# Altium PCB Main Board Layout.PcbDoc
Units mil, origin at the board's own origin, x right, y up, seen from the top; angles counter-clockwise.
Board outline 6700 x 5305 mil, 4 copper layers (Top Layer, VCC5V0 Plane, Ground Plane, Bottom Layer), stack 23.756 mil thick; 86 components, 68 nets, 341 pads, 27 vias.
Unrouted connection lines stored in the file: 4.
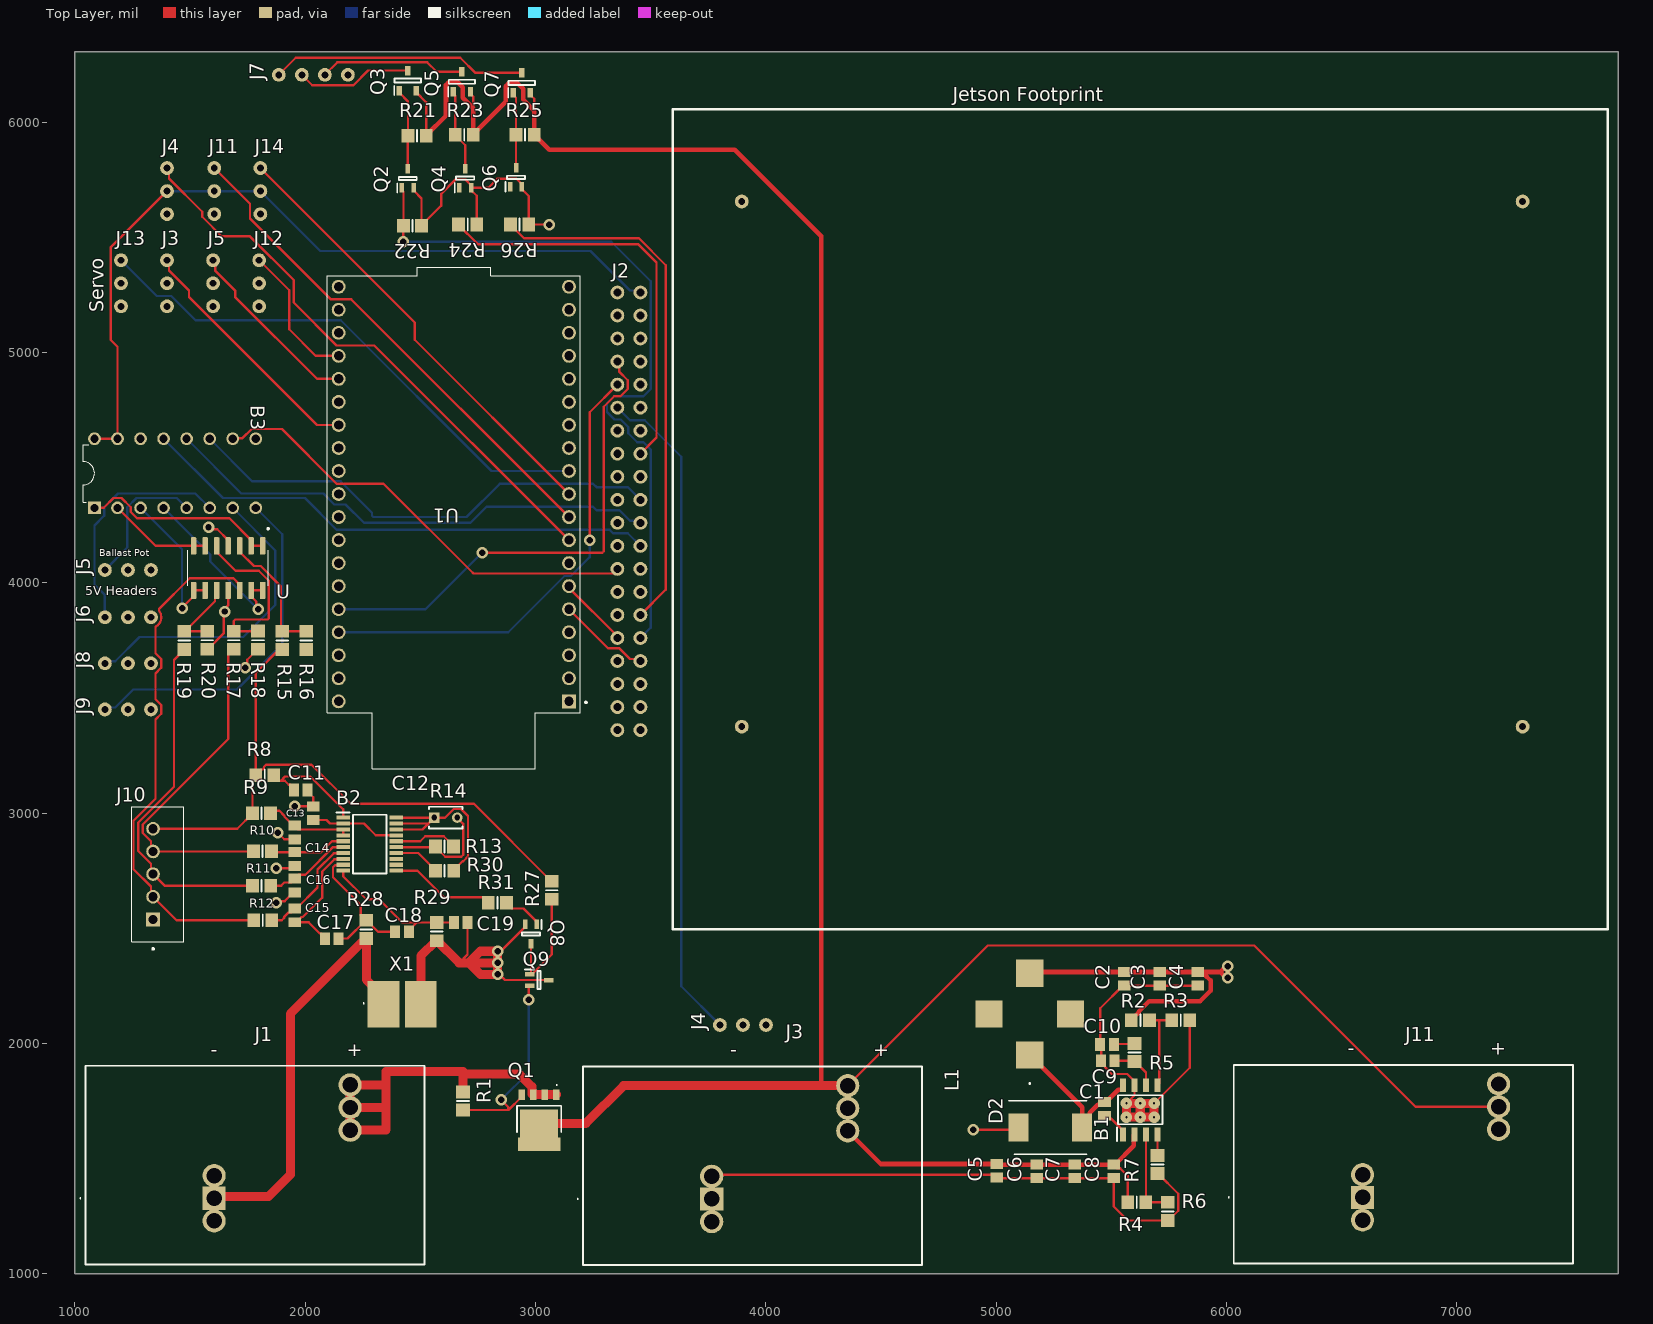
[diagram p0: Top Layer view]
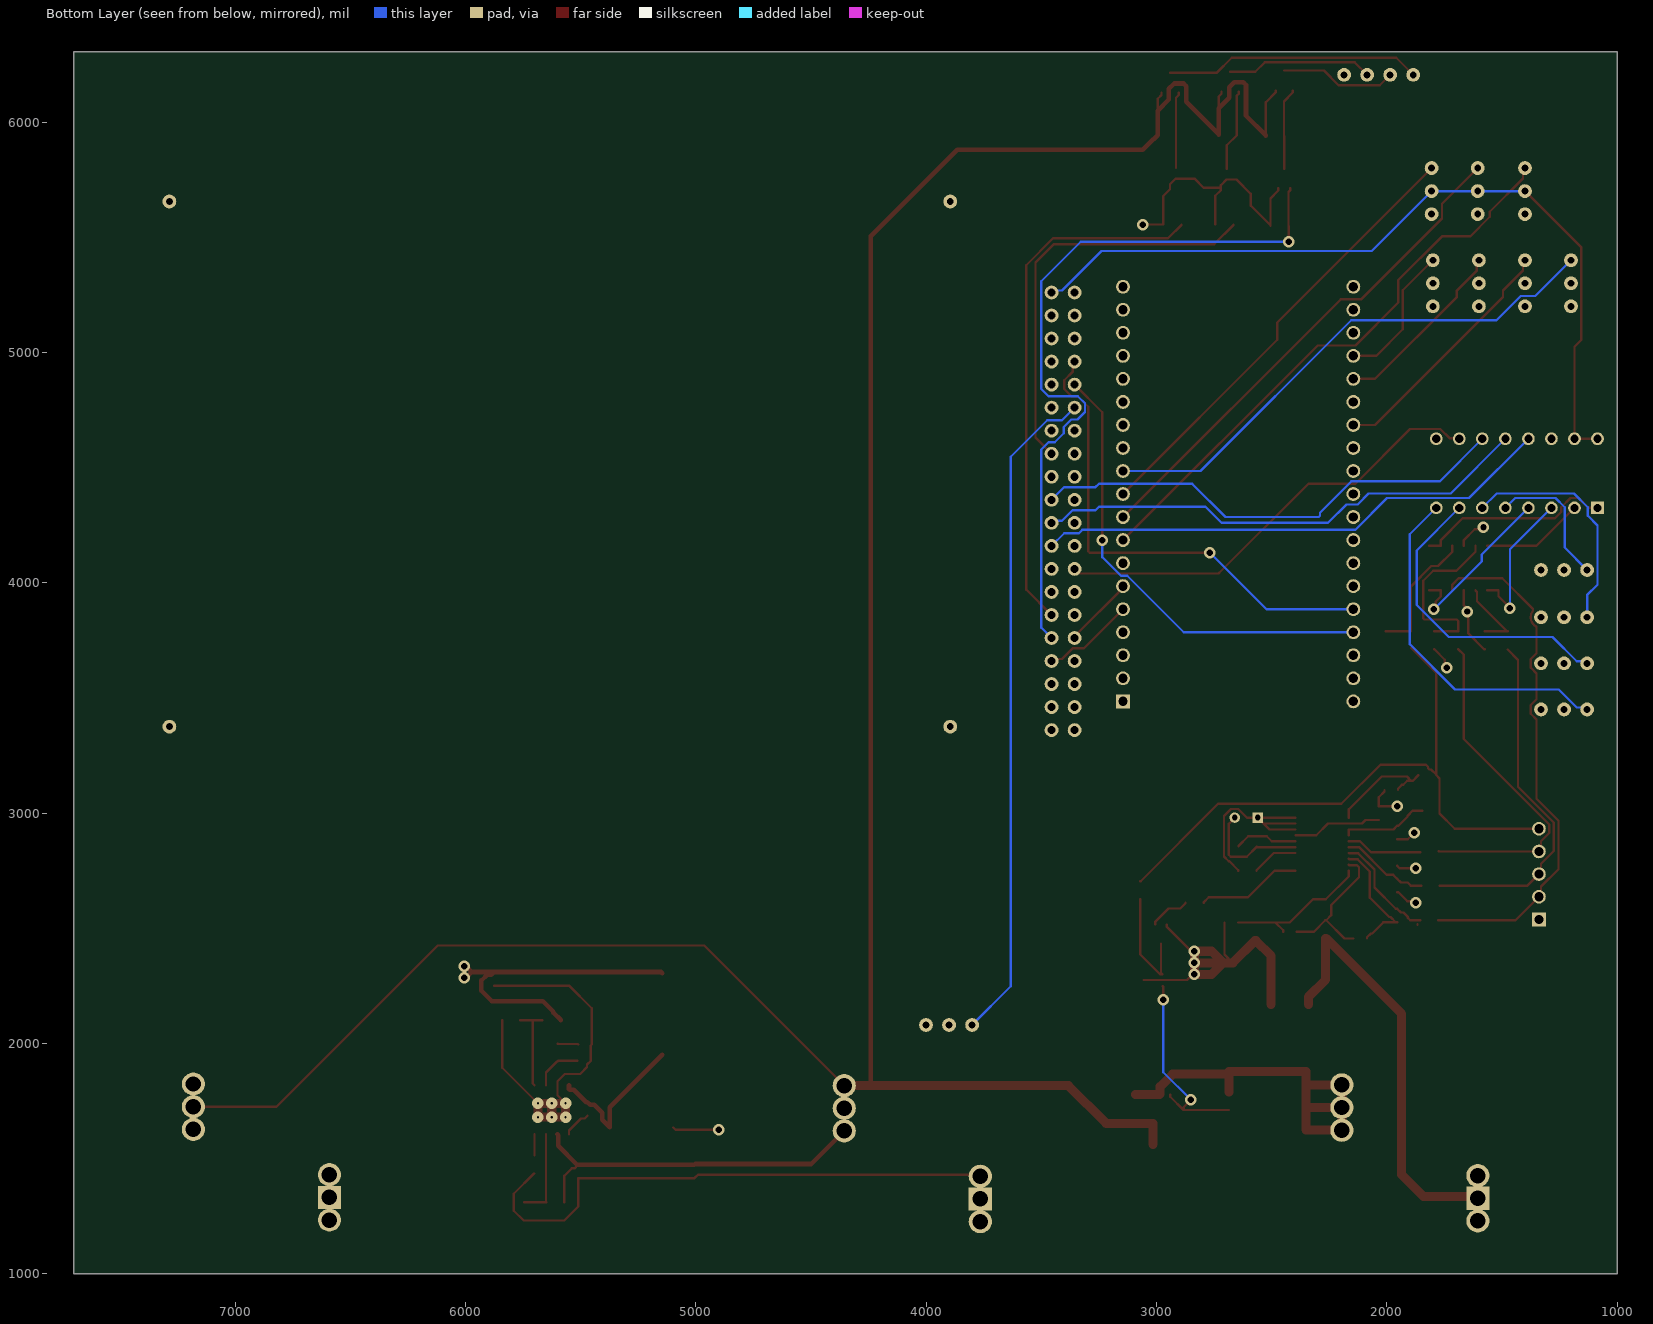
[diagram p1: Bottom Layer view, seen from below]
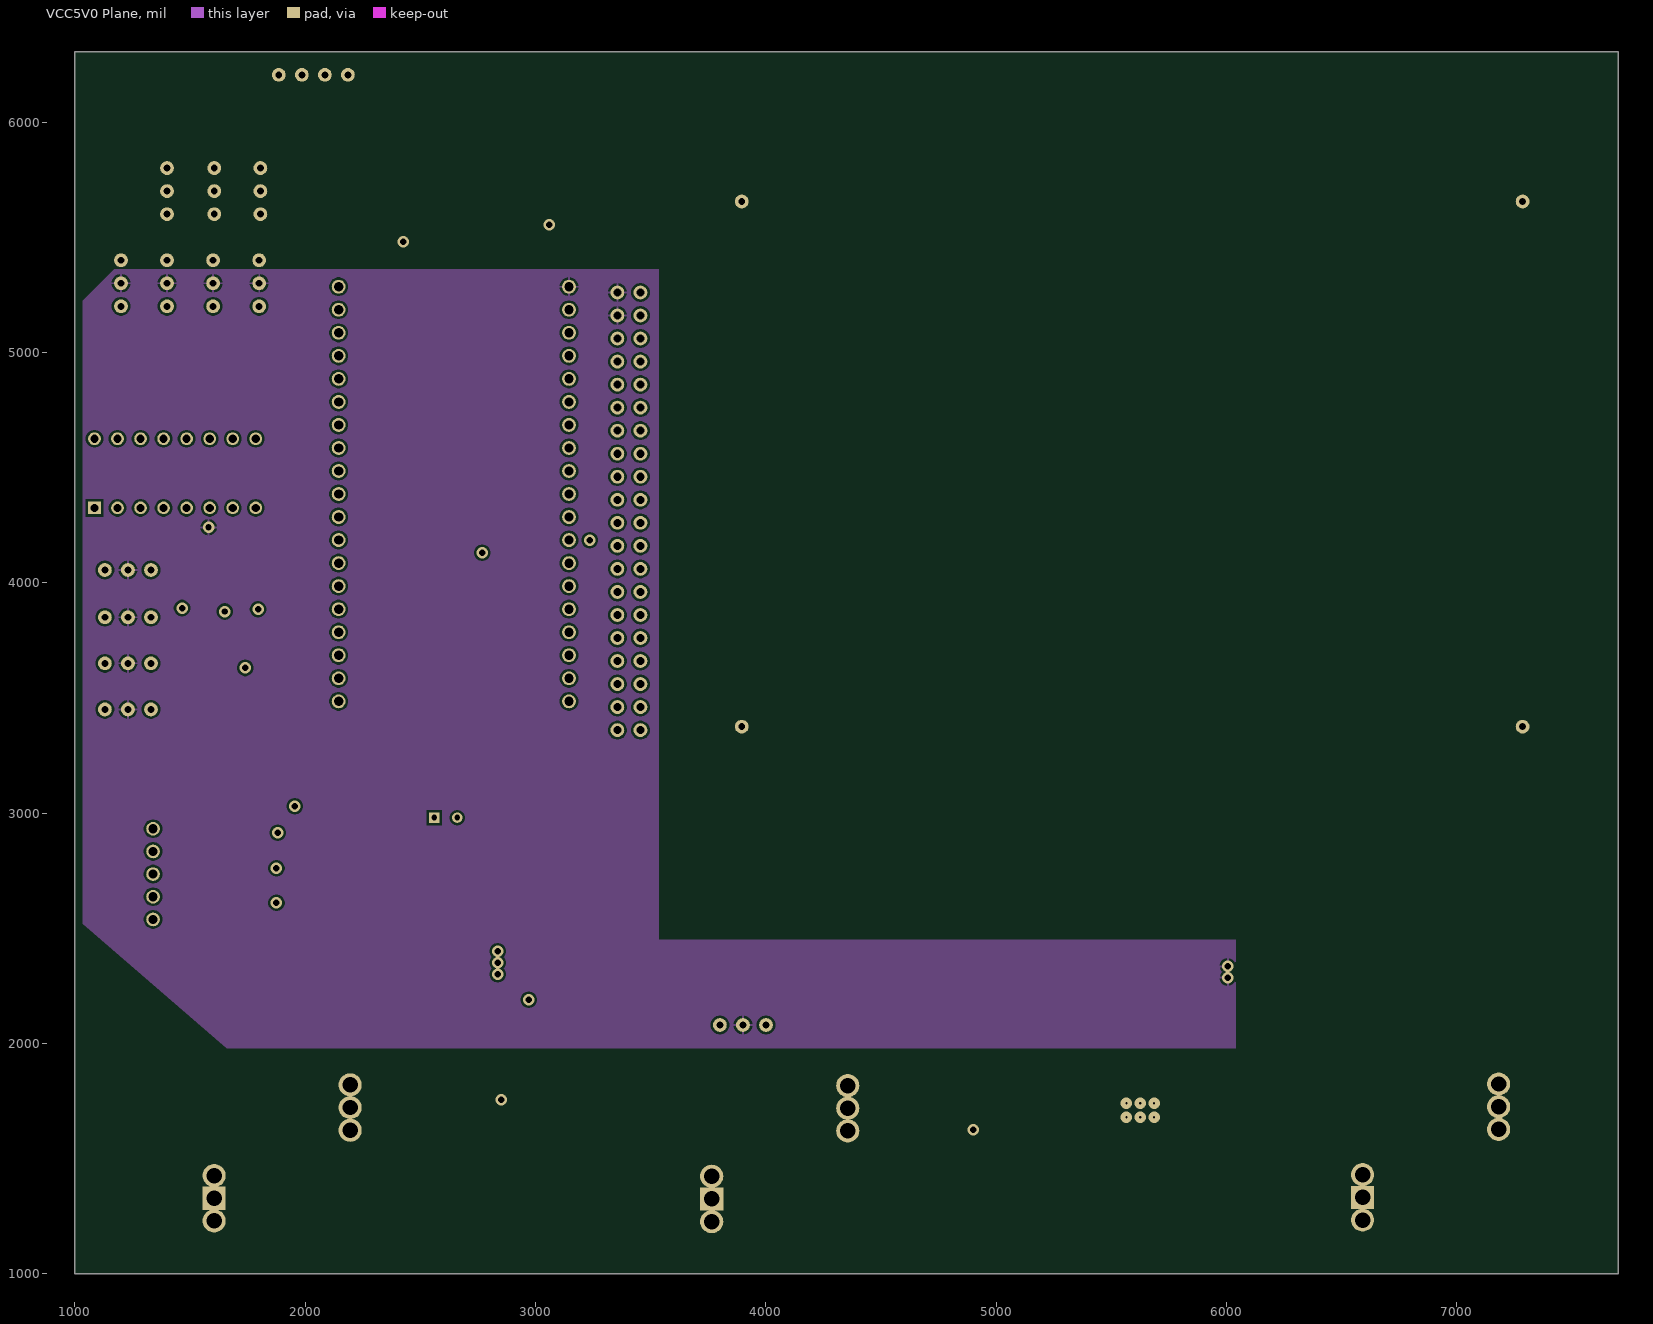
[diagram p2: VCC5V0 Plane]
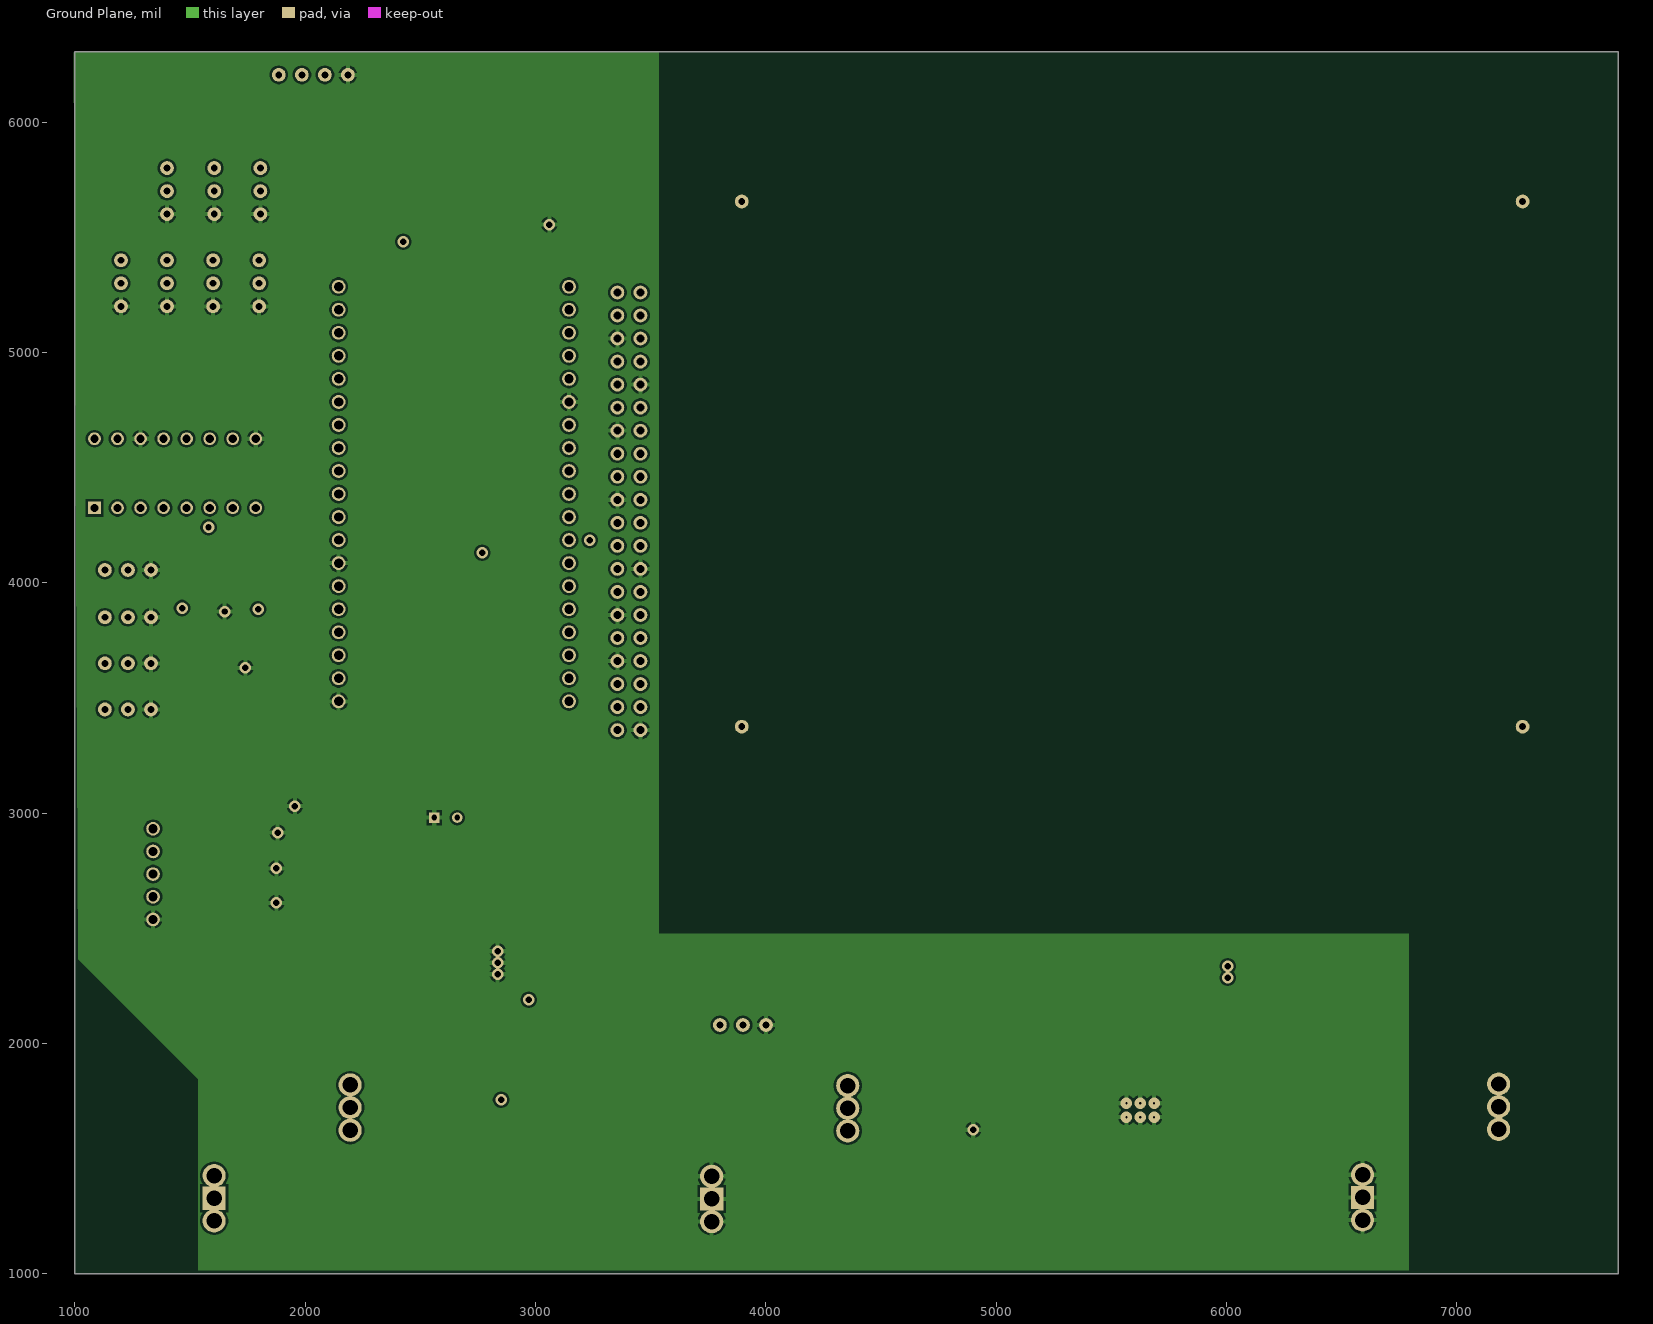
[diagram p3: Ground Plane]

## Layer stack, top to bottom
Top Solder: solder mask 0.4, Solder Resist, Dk 3.5
Top Layer: signal copper 1.4
Dielectric 2: prepreg 2.8, PP-006, Dk 4.1
VCC5V0 Plane: signal copper 1.378
Dielectric 1: dielectric 12.6, FR-4, Dk 4.8
Ground Plane: signal copper 1.378
Dielectric 3: prepreg 2.8, PP-006, Dk 4.1
Bottom Layer: signal copper 1.4
Bottom Solder: solder mask 0.4, Solder Resist, Dk 3.5

## Board outline
1000,1000 7700,1000 7700,6305 1000,6305

## Design rules (kind name [scope] priority, off if disabled: settings)
Clearance [All] p1: gap=10 ignorepadtopadclearanceinfootprint=FALSE except(0: Arc-Hole Track-Hole SMDPad-Hole THPad-Hole Via-Hole Fill-Hole Poly-Hole Region-Hole Text-Hole)
PolygonConnect [All] p1: connectstyle=Relief reliefconductorwidth=20 reliefentries=4 polygonreliefangle="90 Angle" airgapwidth=10
RoutingVias [All] p1: holewidth=28 width=50 viastyle="Through Hole" minholewidth=28 minwidth=50 maxholewidth=28 maxwidth=50
SolderMaskExpansion [All] p1: expansion=4 istentingtop=FALSE
Width [All] p1: maxlimit=39.37 minlimit=10 preferedwidth=10 minimp=50.000000 maximp=50.000000 favimp=50.000000
30 further rules are at their usual default settings.

## Classes and differential pairs
component class ESP32: J3 J4 J5 J11 J12 J13 J14 U1
component class "NMEA 2000 Power Connect": J11
component class "Ballast Motor Control": J3 J4 J5
component class "Status Light Control": J7 Q2 Q3 Q4 Q5 Q6 Q7 R21 R22 R23 R24 R25 R26
component class "Power Supply": B1 C1 C2 C3 C4 C5 C6 C7 C8 C9 C10 D2 J1 L1 Q1 R1 R2 R3 R4 R5 R6 R7
component class "Jetson Nano Connector": J2
component class BMS: *1 B2 C11 C12 C13 C14 C15 C16 C17 C18 C19 J10 Q8 Q9 R8 R9 R10 R11 R12 R13 R14 R27 R28 R29 R30 R31 X1
component class "ADC Module": B3 J6 J8 J9 R15 R16 R17 R18 R19 R20 U

## Components (designator, comment, footprint, x,y, rotation, side; value= is the part's Value field where it differs from the comment)
B1 "TPS54560BDDA" SOIC127P600X170-8N 5625,1711.77 r90 top
B2 "BQ7790400PWR" SOP65P640X120-20N 2280,2865 r0 top
B3 "MCU-MCP3008-I/P(DIP16-7.62MM)" DIP16-2.54-19.2X7.62MM 1435,4475 r0 top
C1 "Capacitor" C0805 5470,1715.47 r90 top value=0.1uF
C2 "Capacitor" C0805 5555,2280 r90 top value=47uF
C3 "Capacitor" C0805 5710,2280 r90 top value=47uF
C4 "Capacitor" C0805 5875,2280.47 r90 top value=47uF
C5 "Capacitor" C0805 5002.5,1446.97 r90 top value="2.2 uF"
C6 "Capacitor" C0805 5175,1445.47 r90 top value="2.2 uF"
C7 "Capacitor" C0805 5340,1445.47 r90 top value="2.2 uF"
C8 "Capacitor" C0805 5510,1444.53 r90 top value="2.2 uF"
C9 "Capacitor" C0805 5484.53,1925 r0 top value=47pF
C10 "Capacitor" C0805 5480.47,1995 r0 top value=4700pF
C11 "Capacitor" C0805 1980.47,3100 r180 top value=1uF
C12 "Capacitor" C0805 2035,2999.53 r90 top value=1uF
C13 "Capacitor" C0805 1955,2915.47 r90 top value=0.1uF
C14 "Capacitor" C0805 1955,2800.47 r90 top value=0.1uF
C15 "Capacitor" C0805 1955,2555.47 r90 top value=0.1uF
C16 "Capacitor" C0805 1955,2685.47 r90 top value=0.1uF
C17 "Capacitor" C0805 2115,2455 r180 top value=0.1uF
C18 "Capacitor" C0805 2420,2485 r180 top value=0.1uF
C19 "Capacitor" C0805 2674.53,2525 r180 top value=0.1uF
D2 "Shottky Diode" DIOM7959X250N 5235,1635 r0 top
J1 "1333817" 1333817 1604.45,1327.87 r90 top
J2 "Jetson Nano Connector" "Jetson Nano Header" 3455,5260 r0 top
J3 "Misc Header" "3 Pin 0.1in Header" 1400,5400 r0 top
J3 "1333817" 1333817 3764.45,1324.72 r90 top
J4 "Misc Header" "3 Pin 0.1in Header" 1400,5800 r0 top
J4 "Servo Connector" "3 Pin 0.1in Header" 3800,2080 r90 top
J5 "Misc Header" "3 Pin 0.1in Header" 1600,5400 r0 top
J5 "Servo Connector" "3 Pin 0.1in Header" 1130,4055 r90 top
J6 "Servo Connector" "3 Pin 0.1in Header" 1130,3850 r90 top
J7 "LED Connector" "4 Pin 0.1in Header" 1885,6205 r90 top
J8 "Servo Connector" "3 Pin 0.1in Header" 1130,3650 r90 top
J9 "Servo Connector" "3 Pin 0.1in Header" 1130,3450 r90 top
J10 "B5B-XH-A" JST_B5B-XH-A 1360,2735 r270 top
J11 "Misc Header" "3 Pin 0.1in Header" 1605,5800 r0 top
J11 "1333817" 1333817 6590,1331.57 r90 top
J12 "Misc Header" "3 Pin 0.1in Header" 1800,5400 r0 top
J13 "Servo Connector" "3 Pin 0.1in Header" 1200,5400 r0 top
J14 "Misc Header" "3 Pin 0.1in Header" 1805,5800 r0 top
"Jetson Footprint" "Comment" "Jetson Footprint" 3895,5655 r0 top
L1 "CDRH10D48_ANP-7R2MC" CDRH10D48ANP7R2MC 5145,2127.17 r90 top
Q1 "BUK6Y24-40PX" BUK6Y2440PX 3015,1670 r180 top
Q2 "BSS138W" SOT65P210X110-3N 2445,5755 r90 top
Q3 "BSH202_215" SOT95P230X110-3N 2445,6180 r90 top
Q4 "BSS138W" SOT65P210X110-3N 2694.41,5756.34 r90 top
Q5 "BSH202_215" SOT95P230X110-3N 2680,6175 r90 top
Q6 "BSS138W" SOT65P210X110-3N 2915,5760 r90 top
Q7 "BSH202_215" SOT95P230X110-3N 2940,6170 r90 top
Q8 "BSS138W" SOT65P210X110-3N 2980,2475 r270 top
Q9 "BSS138W" SOT65P210X110-3N 3015,2275 r0 top
R1 "Resistor" 6-0805_M 2685,1750 r270 top value=100K
R2 "Resistor" 6-0805_M 5625.63,2100 r180 top value=53.6k
R3 "Resistor" 6-0805_M 5800.63,2100 r180 top value=10.2k
R4 "Resistor" 6-0805_M 5610,1310 r180 top value=442k
R5 "Resistor" 6-0805_M 5600,1960.63 r270 top value=16.9k
R6 "Resistor" 6-0805_M 5745,1270.63 r90 top value=90.9K
R7 "Resistor" 6-0805_M 5700,1474.37 r90 top value=243k
R8 "Resistor" 6-0805_M 1824.37,3165 r0 top value=1K
R9 "Resistor" 6-0805_M 1810,3000 r0 top value=1K
R10 "Resistor" 6-0805_M 1814.37,2835 r0 top value=1K
R11 "Resistor" 6-0805_M 1810.63,2685 r0 top value=1K
R12 "Resistor" 6-0805_M 1815.63,2535 r0 top value=1K
R13 "Resistor" 6-0805_M 2604.37,2855 r0 top value=10k
R14 "103AT-2" FP-103AT-2-MFG 2610,2980 r0 top
R15 "Resistor" 6-0805_M 1900,3749.37 r270 top value=100K
R16 "Resistor" 6-0805_M 2005,3749.37 r90 top value=27k
R17 "Resistor" 6-0805_M 1690,3750 r270 top value=100K
R18 "Resistor" 6-0805_M 1795,3750.63 r90 top value=37K
R19 "Resistor" 6-0805_M 1475,3749.37 r270 top value=100K
R20 "Resistor" 6-0805_M 1575,3750 r270 top value=68k
R21 "Resistor" 6-0805_M 2485.63,5940 r0 top value=100K
R22 "Resistor" 6-0805_M 2465.63,5550 r180 top value=100K
R23 "Resistor" 6-0805_M 2690,5945 r0 top value=100K
R24 "Resistor" 6-0805_M 2705,5555 r180 top value=100K
R25 "Resistor" 6-0805_M 2954.37,5945 r0 top value=100K
R26 "Resistor" 6-0805_M 2930.63,5555 r180 top value=100K
R27 "Resistor" 6-0805_M 3070,2665 r90 top value=100k
R28 "Resistor" 6-0805_M 2265,2495 r90 top value=100
R29 "Resistor" 6-0805_M 2570,2485.63 r90 top value=100
R30 "Resistor" 6-0805_M 2605,2750 r180 top value=450K
R31 "Resistor" 6-0805_M 2834.37,2610 r180 top value=4.5k
U "MCP604-I/SL" SOIC127P600X175-14N 1665,4063.35 r270 top
U1 "ESP32-DEVKITC" MODULE_ESP32-DEVKITC 2645,4384.61 r180 top
X1 "WSHP28184L000FEA" WSHP28184L000FEA 2420.91,2170 r0 top

## Footprints (in the part's own frame and the unit in brackets; to place one, negate y for a bottom-side part, rotate by r counter-clockwise, add the part's x,y. Pads: shape width x height; smd on the part's side, far side on the other; paste and mask are expansions set on the pad)
"3 Pin 0.1in Header" [mil]
  round 60 hole 30: 1(0,0) 2(0,-100) 3(0,-200)
"4 Pin 0.1in Header" [mil]
  round 60 hole 30: 1(0,0) 2(0,-100) 3(0,-200) 4(0,-300)
6-0805_M [mm] "Chip Resistor, Body 2.0x1.2mm, IPC Low Density"
  rect 1.4x1.5 smd: 1(-1,0) 2(1,0)
  silkscreen extent 0,-0.65 0,0.65, body extent -1.07,-0.7 1.07,0.7, height 0.7
1333817 [mm]
  rect 2.55x2.55 hole 1.7: 11(0,0)
  round 2.55 hole 1.7: 12(-2.5,0) 13(2.5,0) 21(10,-15) 22(7.5,-15) 23(12.5,-15)
  silkscreen extent -7.3,-23.2 14.6,14.8
BUK6Y2440PX [mm]
  rect 0.7x1.15 smd: 1(-1.905,-2.737) 2(-0.635,-2.737) 3(0.635,-2.737) 4(1.905,-2.737)
  rect 4.7x1.5 smd: 5(0,2.738)
  rect 4.2x3.1 smd: 6(0,0.438)
  silkscreen extent -2.45,-3.85 2.45,1.4
C0805 [mm] "Chip Capacitor, Body 2.0x1.3mm, IPC High Density"
  rect 1.1x1.4 smd: 1(-0.75,0) 2(0.75,0)
  body extent -1.1,-0.72 1.1,0.72, height 1.4
CDRH10D48ANP7R2MC [mm]
  rect 3x3 smd: 1(-4.5,0) 2(0,-4.5) 3(4.5,0) 4(0,4.5)
  silkscreen extent -7.7,-0.05 -7.6,0.05
DIOM7959X250N [mm]
  rect 2.2x3.1 smd: 1(-3.5,0) 2(3.5,0)
  silkscreen extent -4.6,-2.95 3.97,2.95
DIP16-2.54-19.2X7.62MM [mm]
  rect 1.4x1.4 hole 0.9: 1(-8.89,-3.81)
  round 1.4 hole 0.9: 2(-6.35,-3.81) 3(-3.81,-3.81) 4(-1.27,-3.81) 5(1.27,-3.81) 6(3.81,-3.81) 7(6.35,-3.81) 8(8.89,-3.81) 9(8.89,3.81) 10(6.35,3.81) 11(3.81,3.81) 12(1.27,3.81) 13(-1.27,3.81) 14(-3.81,3.81) 15(-6.35,3.81) 16(-8.89,3.81)
  silkscreen extent -10.11,-3.17 -8.89,3.17
FP-103AT-2-MFG [mm]
  rect 1.15x1.15 hole 0.65 paste-1000 mask+0: 1(-1.27,0)
  round 1.15 hole 0.65 paste-1000 mask+0: 2(1.27,0)
  silkscreen extent -1.85,-1.2 1.85,1.2, body extent -1.95,-1.3 1.95,1.3, height 0.25
"Jetson Footprint" [mil]
  round 60 hole 30: 119(0,0) 120(3390,0) 121(0,-2280) 122(3390,-2280)
  silkscreen extent -300,-3160 3760,400
"Jetson Nano Header" [mil]
  round 60 hole 35: 1(0,0) 2(-100,0) 3(0,-100) 4(-100,-100) 5(0,-200) 6(-100,-200) 7(0,-300) 8(-100,-300) 9(0,-400) 10(-100,-400) 11(0,-500) 12(-100,-500) 13(0,-600) 14(-100,-600) 15(0,-700) 16(-100,-700) 17(0,-800) 18(-100,-800) 19(0,-900) 20(-100,-900) 21(0,-1000) 22(-100,-1000) 23(0,-1100) 24(-100,-1100) 25(0,-1200) 26(-100,-1200) 27(0,-1300) 28(-100,-1300) 29(0,-1400) 30(-100,-1400) 31(0,-1500) 32(-100,-1500) 33(0,-1600) 34(-100,-1600) 35(0,-1700) 36(-100,-1700) 37(0,-1800) 38(-100,-1800) 39(0,-1900) 40(-100,-1900)
JST_B5B-XH-A [mm]
  rect 1.508x1.508 / inner round 1.508 / far side rect 1.508x1.508 hole 1: 1(5,-0.525)
  round 1.508 hole 1: 2(2.5,-0.525) 3(0,-0.525) 4(-2.5,-0.525) 5(-5,-0.525)
  silkscreen extent -7.45,-2.88 8.35,2.88, body extent -7.45,-2.88 7.45,2.88, height 7
MODULE_ESP32-DEVKITC [mm]
  rect 1.53x1.53 / inner round 1.53 / far side rect 1.53x1.53 hole 1.02: 1(-12.7,22.85)
  round 1.53 hole 1.02: 2(-12.7,20.31) 3(-12.7,17.77) 4(-12.7,15.23) 5(-12.7,12.69) 6(-12.7,10.15) 7(-12.7,7.61) 8(-12.7,5.07) 9(-12.7,2.53) 10(-12.7,-0.01) 11(-12.7,-2.55) 12(-12.7,-5.09) 13(-12.7,-7.63) 14(-12.7,-10.17) 15(-12.7,-12.71) 16(-12.7,-15.25) 17(-12.7,-17.79) 18(-12.7,-20.33) 19(-12.7,-22.87) 20(12.7,-22.87) 21(12.7,-20.33) 22(12.7,-17.79) 23(12.7,-15.25) 24(12.7,-12.71) 25(12.7,-10.17) 26(12.7,-7.63) 27(12.7,-5.09) 28(12.7,-2.55) 29(12.7,-0.01) 30(12.7,2.53) 31(12.7,5.07) 32(12.7,7.61) 33(12.7,10.15) 34(12.7,12.69) 35(12.7,15.23) 36(12.7,17.77) 37(12.7,20.31) 38(12.7,22.85)
  silkscreen extent -14.67,-25 13.95,30.3, body extent -13.97,-24.8 13.97,30.3, height 3.25
SOIC127P600X170-8N [mm]
  rect 1.525x0.65 smd: 1(-2.712,1.905) 2(-2.712,0.635) 3(-2.712,-0.635) 4(-2.712,-1.905) 5(2.712,-1.905) 6(2.712,-0.635) 7(2.712,0.635) 8(2.712,1.905)
  silkscreen extent -3.47,-2.45 1.6,2.58
SOIC127P600X175-14N [mm]
  rrect25% 1.9x0.6 smd: 1(-2.455,3.81) 2(-2.455,2.54) 3(-2.455,1.27) 4(-2.455,0) 5(-2.455,-1.27) 6(-2.455,-2.54) 7(-2.455,-3.81) 8(2.455,-3.81) 9(2.455,-2.54) 10(2.455,-1.27) 11(2.455,0) 12(2.455,1.27) 13(2.455,2.54) 14(2.455,3.81)
  silkscreen extent -4.45,-4.43 1.95,4.51
SOP65P640X120-20N [mm]
  rect 1.475x0.45 smd: 1(-2.938,2.925) 2(-2.938,2.275) 3(-2.938,1.625) 4(-2.938,0.975) 5(-2.938,0.325) 6(-2.938,-0.325) 7(-2.938,-0.975) 8(-2.938,-1.625) 9(-2.938,-2.275) 10(-2.938,-2.925) 11(2.938,-2.925) 12(2.938,-2.275) 13(2.938,-1.625) 14(2.938,-0.975) 15(2.938,-0.325) 16(2.938,0.325) 17(2.938,0.975) 18(2.938,1.625) 19(2.938,2.275) 20(2.938,2.925)
  silkscreen extent -3.67,-3.25 1.85,3.5
SOT65P210X110-3N [mm]
  rect 1.05x0.5 smd: 1(-1.05,0.65) 2(-1.05,-0.65) 3(1.05,0)
  silkscreen extent -1.58,-1 0.18,1.15
SOT95P230X110-3N [mm]
  rect 1.05x0.6 smd: 1(-1.1,0.95) 2(-1.1,-0.95) 3(1.1,0)
  silkscreen extent -1.63,-1.45 0.23,1.5
WSHP28184L000FEA [mm]
  rect 3.5x5.1 smd: 1(-2.055,0) 2(2.055,0)
  silkscreen extent -4.3,0.05 -4.2,0.15

## Part data
B1: "Switching Voltage Regulators A 595-TPS54560BDDAR", Manufacturer_Name="Texas Instruments", Mouser Part Number=595-TPS54560BDDA, Datasheet Link=http://www.ti.com/lit/ds/symlink/tps54560b.pdf, Geometry.Height=1.7mm, Manufacturer_Part_Number=TPS54560BDDA, Mouser Price/Stock=https://www.mouser.co.uk/ProductDetail/Texas-Instruments/TPS54560BDDA?qs=gZXFycFWdAMqSdZZ7nACGQ%3D%3D
B2: "3-4S Low Power Protector", Manufacturer_Name="Texas Instruments", Mouser Part Number=595-BQ7790400PWR, Datasheet Link=http://www.ti.com/lit/gpn/bq77904, Geometry.Height=1.2mm, Manufacturer_Part_Number=BQ7790400PWR, Mouser Price/Stock=https://www.mouser.co.uk/ProductDetail/Texas-Instruments/BQ7790400PWR?qs=SMCV84mnLhnU0KDK1YzY%252Bw%3D%3D
B3: "10 Bit Analog to Digital Converter 4, 8 Input 1 SAR 16-PDIP", Package="DIP-16 Microchip", Availability=Unavailable, MF=Microchip, MP=MCP3008-I/P, Price=None, SnapEDA_Link=https://www.snapeda.com/parts/MCP3008-I/P/Microchip/view-part/43628/?ref=snap
J1 J3 J11: "Pluggable Terminal Blocks LPTA 16/ 2-10,0-ZB", Manufacturer_Name="Phoenix Contact", Mouser Part Number=651-1333817, Datasheet Link=https://www.phoenixcontact.com/en-pc/products/pcb-terminal-block-lpta-16-2-100-zb-1333817, Geometry.Height=46.4mm, Manufacturer_Part_Number=1333817, Mouser Price/Stock=https://www.mouser.co.uk/ProductDetail/Phoenix-Contact/1333817?qs=Jm2GQyTW%2Fbi%252BbQzIAqu7ww%3D%3D
J3 J4 J5 J11 J12 J14: library part "Servo Connector"
J10: "Connector Header Through Hole 5 position 0.098 (2.50mm)", Package=None, Check_prices=https://www.snapeda.com/parts/B5B-XH-A/JST+Sales+America+Inc./view-part/?ref=eda, MF="JST Sales", MP=B5B-XH-A, SnapEDA_Link=https://www.snapeda.com/parts/B5B-XH-A/JST+Sales+America+Inc./view-part/?ref=snap
L1: "Fixed Inductors SMD Power Inductor", Manufacturer_Name=Sumida, Manufacturer_Part_Number=CDRH10D48/ANP-7R2MC, Mouser Part Number=851-CDRH10D48/ANP7R2, Datasheet Link=https://datasheet.datasheetarchive.com/originals/distributors/Datasheets-DGA11/2227373.pdf, Geometry.Height=5mm, Mouser Price/Stock=https://www.mouser.co.uk/ProductDetail/Sumida/CDRH10D48-ANP-7R2MC?qs=mT6umqgwvA2FCldKZoKGVw%3D%3D
Q1: "NEXPERIA - BUK6Y24-40PX - Power MOSFET, P Channel, 40 V, 39 A, 0.019 ohm, LFPAK56, Surface Mount", Manufacturer_Name=Nexperia, Mouser Part Number=771-BUK6Y24-40PX, Datasheet Link=https://assets.nexperia.com/documents/data-sheet/BUK6Y24-40P.pdf, Geometry.Height=1.2mm, Manufacturer_Part_Number=BUK6Y24-40PX, Mouser Price/Stock=https://www.mouser.co.uk/ProductDetail/Nexperia/BUK6Y24-40PX?qs=vmHwEFxEFR8tyd2WwTEwBg%3D%3D
Q2 Q4 Q6 Q8 Q9: "BSS138W N-Channel MOSFET, 210 mA, 50 V, 3-Pin SOT-323 ON Semiconductor", Manufacturer_Name=onsemi, Mouser Part Number=512-BSS138W, Datasheet Link=https://www.onsemi.com/pub/Collateral/BSS138W-D.pdf, Geometry.Height=1.1mm, Manufacturer_Part_Number=BSS138W, Mouser Price/Stock=https://www.mouser.co.uk/ProductDetail/onsemi-Fairchild/BSS138W?qs=iQhsftLtcNQX02h325QGXg%3D%3D
Q3 Q5 Q7: "NEXPERIA - BSH202,215 - Power MOSFET, P Channel, 30 V, 520 mA, 0.63 ohm, SOT-23, Surface Mount", Manufacturer_Name=Nexperia, Manufacturer_Part_Number=BSH202,215, Mouser Part Number=771-BSH202215, Datasheet Link=https://assets.nexperia.com/documents/data-sheet/BSH202.pdf, Geometry.Height=1.1mm, Mouser Price/Stock=https://www.mouser.co.uk/ProductDetail/Nexperia/BSH202215?qs=me8TqzrmIYVIfEr%252BmEwLmg%3D%3D
R14: library part CMP-2000-05824-2, "Thermistor NTC 10KOhm 1% 2-Pin", Max Operating Temperature=110°C, Min Operating Temperature=-50°C, Resistance=10kR, Tolerance=1%, Height=2.4mm, Lead Pitch=2.54mm, Length=17mm, Number of Pins=2, Packaging=Bulk, RoHS Compliant=Yes, Series=AT, Termination=Radial, Width=3.7mm
U: "General Purpose Amplifier 4 Circuit Rail-to-Rail 14-SOIC", Package="SOIC-14 Microchip", Availability=Unavailable, MF=Microchip, MP=MCP604-I/SL, Price=None, SnapEDA_Link=https://www.snapeda.com/parts/MCP604-I/SL/Microchip/view-part/49119/?ref=snap
U1: "ESP32-WROOM-32UE series Transceiver; 802.11 b/g/n (Wi-Fi, WiFi, WLAN), Bluetooth Â® Smart Ready 4.x Dual Mode Evaluation Board", Package=None, Availability="In Stock", Check_prices=https://www.snapeda.com/parts/ESP32-DEVKITC/Espressif+Systems/view-part/?ref=eda, MF="Espressif Systems", MP=ESP32-DEVKITC, Price=None, Purchase-URL=https://pricing.snapeda.com/search/part/ESP32-DEVKITC/?ref=eda, SnapEDA_Link=https://www.snapeda.com/parts/ESP32-DEVKITC/Espressif+Systems/view-part/?ref=snap
X1: "Current Sense Resistors - SMD 10W .004ohms 1%", Manufacturer_Name=Vishay, Mouser Part Number=71-WSHP28184L000FEA, Datasheet Link=https://www.vishay.com/doc?30347, Geometry.Height=1.75mm, Manufacturer_Part_Number=WSHP28184L000FEA, Mouser Price/Stock=https://www.mouser.co.uk/ProductDetail/Vishay-Dale/WSHP28184L000FEA?qs=WY0B%252Bpw29jP7%252BmGFaWxGvg%3D%3D
C1 C2 C3 C4 C5 C6 C7 C8 C9 C10 C11 C12 C13 C14 C15 C16 C17 C18 C19: SimulationGenericComponent=True
D2: AF=1, BV=0, BV_MAX=1e99, CJO=0, CJP=0, CTA=0, CTP=0, EG=1.11, FC=0.5, FCS=0.5, FV_MAX=1e99, IBV=0.001, IKF=0, IKR=0, IS=1e-14, ISR=1e-14, JSW=0, JTUN=0, JTUNSW=0, KEG=1, KF=0, LEVEL=1, MJSW=0.33, N=1, NBV=1, NR=1, NS=1, NTUN=30, PHP=1, RS=0, SimulationGenericComponent=True, TCV=0, TLEV=0, TLEVC=0, TM1=0, TM2=0, TNOM=27, TPB=0, TPHP=0, TRS=0, TRS2=0, TT=0, TTT1=0, TTT2=0, VJ=1, XTI=3, XTITUN=3
R1 R2 R3 R4 R5 R6 R7 R8 R9 R10 R11 R12 R13 R15 R16 R17 R18 R19 R20 R21 R22 R23 R24 R25 R26 R27 R28 R29 R30 R31: SimulationGenericComponent=True, TC1=0, TC2=0

## Via types
v1: diameter 50, hole 28, Top Layer to Bottom Layer, 20 vias
v2: diameter 50, hole 10, Top Layer to Bottom Layer, tented bottom, 6 vias
v3: diameter 50, hole 28, Top Layer to Bottom Layer, tented both sides, 1 vias

## Nets (pads, with @x,y where several pads share a name; then routed paths per layer and width w, separated by ;. In a path a pad name is that pad's centre, name@x,y a point inside that pad or via, vN(x,y) a via of type N, cw(c..) or ccw(c..) an arc to the next point about the centre after c; other vN are vias at no path point)
GND: B1.7 B2.8 B2.18 B2.19 B2.20 B3.9 B3.14 C2.1 C3.1 C4.1 C5.1 C6.1 C7.1 C8.1 C9.1 C10.1 C11.1 C12.2 C13.1 C14.1 C15.1 C16.1 C17.2 C19.1 D2.1 J2.6 J2.9 J2.14 J2.20 J2.25 J2.30 J2.34 J2.39 J3.3 J3.11 J3.12 J3.13 J4.3 J5.3 J6.3 J7.4 J8.3 J9.3 J10.1 J11.3 J11.11 J11.12 J11.13 J12.3 J13.3 J14.3 Q2.2 Q4.2 Q6.2 Q8.2 Q9.3 R3.1 R6.1 R7.1 R14.1 R16.1 R18.1 R20.2 R22.1 R24.1 R26.1 R29.1 R30.1 U1.14 U1.32 U1.38 U.11 X1.2 | length 9562.7
  Top Layer w10: R20.2 1576.97,3710.63 1645.47,3779.13 1645.47,3870.47 v1(1650,3875) 1650,3885.82 1665,3900.82 U.11 ; v3(1740,3630) 1747.65,3637.65 1747.65,3665.88 1793.03,3711.26 R18.1 ; v1(1875,2610) 1882.65,2617.65 1910.8,2617.65 1949.09,2655.94 C16.1 ; v1(1875,2760) 1944.06,2760 C14.1 ; v1(1880,2915) 1909.06,2885.94 C13.1 ; C15.1 C15.1@1960.91,2525.94 ; v1(1955,3030) 2034.06,3030 C12.2 2035,3069.09 2010,3094.09 C11.1 ; C17.2 2085.47,2460.91 2068.82,2477.56 2062.91,2477.56 2014.53,2525.94 C15.1@1960.91,2525.94 ; B2.8 2162.6,2799.29 2126.39,2799.29 2073.32,2746.22 2073.32,2632.89 1988.77,2548.35 1983.31,2548.35 C15.1@1960.91,2525.94 ; B2.18 2508.98,2928.98 2534.57,2954.57 ; B2.19 2534.57,2954.57 ; B2.20 2559.84,2980.16 R14.1 ; Q2.2 2470.59,5702.83 2505,5668.43 R22.1@2505,5551.97 ; R22.1 R22.1@2505,5551.97 ; R30.1 2644.37,2751.97 2682.87,2790.47 2685.8,2790.47 2706.3,2810.97 2706.3,2986.93 2675.59,3017.64 2644.41,3017.64 2606.77,2980 R14.1 ; 2668.23,2350 2704.06,2385.83 C19.1 ; R24.1 2744.37,5679.8 2720,5704.17 Q4.2 ; v1(2835,2300) 2841.57,2300 2866.57,2275 Q9.3 ; v1(2835,2400) 2842.65,2407.65 2856.55,2407.65 2954.41,2505.51 Q8.2 ; v1(3060,5555) R26.1 2970,5678.43 2940.59,5707.83 Q6.2 2940.59,5729.49 2915.75,5754.33 2834.82,5754.33 2795.49,5715 Q4.2 ; J3.13 3771.3,1430 4989.94,1430 C5.1 5004.94,1415 C8.1 5510,1292.33 5571.07,1231.26 R6.1 5746.97,1231.26 5789.53,1273.82 5789.53,1347.44 5701.97,1435 R7.1 ; v1(4900,1625) 5087.2,1625 D2.1 ; C2.1 C2.1@5555.47,2250.94 ; v2(5565,1740) 5600,1775 B1.7 5600,1835.77 5568.37,1867.4 5501.23,1867.4 5471.65,1896.98 5471.65,1908.35 C9.1 5455,1990.94 C10.1 5450.94,2152.32 5549.57,2250.94 C2.1@5555.47,2250.94 ; v2(5685,1740) 5685.48,1740 5840,1894.52 R3.1 ; C4.1 C2.1@5555.47,2250.94 ; R22.1@2505,5551.97 2590.16,5637.13 2590.16,5688.07 2652.76,5750.67 2695.16,5750.67 2720,5725.83 Q4.2 ; 2534.57,2954.57 R14.1
  Top Layer w39.37: X1.2 2501.81,2380.04 2568.03,2446.26 R29.1 2571.97,2446.26 2668.23,2350 2710,2350 ; 2710,2350 2760,2300 v1(2835,2300) v1(2835,2350) ; 2710,2350 v1(2835,2350) ; 2710,2350 2760,2400 v1(2835,2400) v1(2835,2350) ; v2(5625,1680) v2(5625,1740) ; v2(5625,1680) v2(5685,1680) v2(5685,1740) v2(5625,1740) ; v2(5625,1680) v2(5565,1680) v2(5565,1740) v2(5625,1740)
NetB1_1: B1.1 C1.1 | length 123.6
  Top Layer w10: C1.1 5481.81,1674.13 5498.09,1674.13 5550,1622.22 B1.1
NetB1_3: B1.3 R4.1 R6.2 | length 390.9
  Top Layer w10: B1.3 5650,1310.63 R4.1 R6.2
NetB1_4: B1.4 R7.2 | length 91.3
  Top Layer w10: R7.2 B1.4
NetB1_5: B1.5 R2.1 R3.2 | length 383.2
  Top Layer w10: R2.1 5713.13,2100 ; B1.5 5707.56,1826.1 5707.56,2094.43 5713.13,2100 ; R3.2 5713.13,2100
NetB1_6: B1.6 C9.2 R5.2 | length 212.1
  Top Layer w10: C9.2 5596.26,1925 R5.2 5601.97,1921.26 5650,1873.23 B1.6
NetB1_8: B1.8 C1.2 D2.2 L1.1 | length 690.8
  Top Layer w19.68: L1.1 5372.8,1722.2 D2.2 5406.26,1668.46 5406.26,1699.48 5439.97,1733.19 5458.19,1733.19 C1.2 5475.91,1745 5529.27,1798.37 5547.05,1798.37 5550,1801.32 B1.8
NetB2_1: B2.1 C11.2 R8.2 | length 491.2
  Top Layer w10: R8.2 1863.74,3163.03 1886.3,3140.47 1894.29,3140.47 ; C11.2 1950.94,3105.91 1934.29,3122.56 1928.39,3122.56 1910.47,3140.47 1894.29,3140.47 ; B2.1 2164.33,3016.1 2021.86,3158.56 1912.38,3158.56 1894.29,3140.47
NetB2_2: B2.2 B2.17 C12.1 | length 388.3
  Top Layer w10: C12.1 2092.08,2970 2107.51,2954.57 B2.2 2255.28,2954.57 2306.46,2903.39 B2.17
NetB2_3: B2.3 B2.4 C13.2 R9.2 | length 380.5
  Top Layer w10: R9.2@1845,3010 1887.56,3010 1910,2987.56 1910,2984.09 1949.09,2945 C13.2 1971.02,2928.98 B2.3 B2.4
NetB2_5: B2.5 C14.2 R10.2 | length 329.8
  Top Layer w10: R10.2@1854.37,2830 C14.2 2020,2830 2068.4,2830 2116.19,2877.8 B2.5
NetB2_6: B2.6 C16.2 R11.2 | length 383.6
  Top Layer w10: R11.2 1895.83,2685 1909.17,2698.35 1938.35,2698.35 C16.2 1971.65,2731.65 1999.52,2731.65 2120.07,2852.2 B2.6
NetB2_7: B2.7 C15.2 R12.2 | length 479.6
  Top Layer w10: R12.2 1897.56,2535 1909.39,2546.83 1909.39,2550.76 1926.98,2568.35 1938.35,2568.35 C15.2 1960.91,2585 2053.32,2677.42 2053.32,2754.51 2123.69,2824.88 2162.6,2824.88 B2.7 ; R12.2@1866.26,2515 R12.2@1866.26,2516.97
NetB2_9: B2.9 C17.1 C18.2 R28.2 | length 637.3
  Top Layer w10: C17.1 2183.66,2455 R28.2@2263.03,2534.37 ; B2.9 2162.6,2773.7 2129.08,2773.7 2120.3,2764.91 2120.3,2721.01 2240.47,2600.83 2240.47,2556.93 R28.2@2263.03,2534.37 ; C18.2 2316.34,2485 2266.97,2534.37 R28.2 R28.2@2263.03,2534.37
NetB2_10: B2.10 C18.1 C19.2 R29.2 | length 641.9
  Top Layer w10: B2.10 2164.33,2725.98 2264.82,2625.49 2320.41,2625.49 2420.9,2525 2483.62,2525 ; C18.1 2449.53,2490.91 2483.62,2525 ; C19.2 R29.2 2483.62,2525
NetB2_11: B2.11 R31.2 | length 458.4
  Top Layer w10: B2.11 2487.49,2749.84 2602.8,2634.53 2772.44,2634.53 2795,2611.97 R31.2
NetB2_14: B2.14 R30.2 | length 202.8
  Top Layer w10: B2.14 2490.98,2826.61 2565.63,2751.97 R30.2
NetB2_15: B2.15 R13.1 R14.2 | length 486.7
  Top Layer w10: B2.15 2562.2,2852.2 R13.1 2565,2853.03 2607.56,2810.47 2677.51,2810.47 2686.3,2819.26 2686.3,2953.07 2660,2979.37 R14.2
NetB2_16: B2.16 R13.2 | length 276.7
  Top Layer w10: B2.16 2498.71,2877.8 2520.44,2899.53 2601.18,2899.53 2643.74,2856.97 R13.2
NetB3_1: B3.1 U.1 U.2 | length 860.5
  Top Layer w10: B3.1 1124.81,4325 1167.37,4367.56 1202.63,4367.56 1242.44,4327.75 1242.44,4307.37 1269.81,4280 1670.59,4280 1765,4185.59 U.2 U.1
NetB3_2: B3.2 U.6 U.7 | length 448.3
  Top Layer w10: B3.2 1350,4160 U.7 U.6
NetB3_3: B3.3 U.8 U.9 | length 657
  Top Layer w10: v1(1465,3890) 1465,3891.1 1515,3941.1 U.8 U.9
  Bottom Layer w10: B3.3 1465,4145 v1(1465,3890)
NetB3_4: B3.4 U.13 U.14 | length 753.9
  Top Layer w10: v1(1795,3885) 1787.35,3892.65 1787.35,3918.76 1765,3941.1 U.13 U.14
  Bottom Layer w10: B3.4 1587.78,4122.22 1587.78,4092.22 v1(1795,3885)
NetB3_5: B3.5 J5.1@1130,4055 | length 604.7
  Bottom Layer w10: J5.1@1130,4055 1227.56,4152.56 1227.56,4327.75 1267.37,4367.56 1442.44,4367.56 B3.5
NetB3_6: B3.6 J6.1 | length 1022.1
  Bottom Layer w10: J6.1 1130,3946.08 1085,3991.08 1085,4248.67 1127.56,4291.23 1127.56,4327.75 1187.37,4387.56 1522.44,4387.56 B3.6
NetB3_7: B3.7 J8.1 | length 1343.2
  Bottom Layer w10: J8.1 1138.64,3658.64 1175,3658.64 1280.36,3764 1730.57,3764 1870,3903.43 1870,4140 B3.7
NetB3_8: B3.8 J9.1 | length 1526.6
  Bottom Layer w10: J9.1 1138.64,3458.64 1175,3458.64 1252.86,3536.5 1703.07,3536.5 1900,3733.43 1900,4210 B3.8
NetB3_10: B3.10 J2.26 | length 1955.9
  Top Layer w10: B3.10 1687.75,4627.75 1727.56,4627.75 1767.37,4667.56 1898.63,4667.56 2136.08,4430.12 2339.67,4430.12 2726.86,4042.93 2729.79,4040 3141.74,4040 ccw(c3145,4085) 3148.26,4040 3335,4040 J2.26
NetB3_11: B3.11 J2.19 | length 2107.6
  Bottom Layer w10: B3.11 1770.12,4439.88 2153.92,4439.88 2290,4303.81 2290,4290.86 2295.86,4285 2699.79,4285 2844.9,4430.12 3248.83,4430.12 3263.95,4415 3400,4415 J2.19
NetB3_12: B3.12 J2.21 | length 2179.3
  Bottom Layer w10: B3.12 1722.44,4387.56 2078.63,4387.56 2126.31,4339.88 2175.12,4339.88 2255,4260 2716.86,4260 2786.97,4330.12 3248.83,4330.12 3263.95,4315 3363.64,4315 3410,4268.64 3446.36,4268.64 J2.21
NetB3_13: B3.13 J2.23 | length 2262.6
  Bottom Layer w10: B3.13 1642.44,4367.56 1998.63,4367.56 2136.08,4230.12 3321.24,4230.12 3336.36,4215 3400,4215 J2.23
NetC10_2: C10.2 R5.1 | length 92.4
  Top Layer w10: C10.2 5510,1995.53 5511.97,1997.5 5597.5,1997.5 R5.1
NetJ1_11: J1.11 J1.12 J1.13 R28.1 X1.1 | length 2049.9
  Top Layer w39.37: J1.12 J1.11 ; J1.13 J1.11 ; X1.1 2340,2201.5 2265,2276.5 R28.1 2263.03,2455.63 1935.64,2128.24 1935.64,1430.64 1840,1335 1611.57,1335 J1.11
NetJ1_21: J1.21 J1.22 J1.23 Q1.1 Q1.2 Q1.3 R1.1 | length 1790.4
  Top Layer w39.37: R1.1 2685,1866.25 2929.91,1866.25 2984.09,1812.06 2984.09,1780.71 2987.05,1777.76 Q1.3 Q1.2 Q1.1 ; 2685,1877.32 2350.75,1877.32 2350.75,1825 ; J1.21 2350.75,1721.57 ; J1.21 J1.23 2345.75,1820 2350.75,1825 ; J1.21 J1.22 2348.9,1623.15 2350.75,1625 2350.75,1721.57 ; 2350.75,1721.57 2350.75,1825
NetJ2_8: J2.8 U1.34 | length 2156.2
  Top Layer w10: v1(2767.69,4130.38) 3289.53,4130.38 3295.38,4136.24 3295.38,4764.02 3341.36,4810 3368.64,4810 3400,4841.36 3400,4878.64 3363.64,4915 3363.64,4951.36 J2.8
  Bottom Layer w10: U1.34 2522.3,3885 v1(2767.69,4130.38)
NetJ2_10: J2.10 U1.35 | length 2023.6
  Top Layer w10: v1(3235,4185) 3235,4740 J2.10
  Bottom Layer w10: U1.35 2881.19,3785 3126.31,4030.12 3153.92,4030.12 3235,4111.19 v1(3235,4185)
NetJ2_12: J2.12 J4.1@3800,2080 | length 2901.6
  Bottom Layer w10: J2.12 3410,4705 3473.64,4705 3632.04,4546.6 3632.04,2247.96 J4.1@3800,2080
NetJ2_15: J2.15 Q4.1 R24.2 | length 1787.9
  Top Layer w10: R24.2 2665.63,5553.03 2748.66,5470 3445,5470 3525,5390 3525,4630 J2.15
NetJ2_29: J2.29 Q6.1 R26.2 | length 2311.9
  Top Layer w10: R26.2 2891.26,5553.03 2949.29,5495 3448.28,5495 3565,5378.28 3565,3970 J2.29
NetJ2_31: J2.31 Q2.1 R22.2 | length 3214
  Top Layer w10: Q2.1 2419.41,5702.83 2426.26,5695.98 R22.2 2425,5548.74 v1(2425,5480)
  Bottom Layer w10: v1(2425,5480) 3328.28,5480 3500,5308.28 3500,4841.36 3468.64,4810 3341.36,4810 3310,4778.64 3310,4741.36 3342.61,4708.75 3369.89,4708.75 3402.5,4676.14 3402.5,4648.86 3441.36,4610 3468.64,4610 3500,4578.64 3500,3805 J2.31
NetJ2_32: J2.32 U1.6 | length 312
  Top Layer w10: U1.6 3145,3977.5 3355,3767.5 J2.32
NetJ2_33: J2.33 U1.5 | length 403.2
  Top Layer w10: U1.5 3315,3715 3363.64,3715 3410,3668.64 3446.36,3668.64 J2.33
NetJ3_1: J3.1 U1.26 | length 1078.4
  Top Layer w10: J3.1 1408.64,5391.36 1408.64,5355 1495.46,5268.18 1495.46,5240.9 2051.36,4685 U1.26
NetJ4_1: J4.1@1400,5800 U1.8 | length 2505.4
  Top Layer w10: J4.1@1400,5800 1408.64,5791.36 1408.64,5755 1552.96,5610.68 1552.96,5588.4 1637.84,5503.52 1760.12,5503.52 1950,5313.64 1950,5216.19 2136.08,5030.12 2299.88,5030.12 U1.8
NetJ5_1: J5.1@1600,5400 U1.24 | length 795.6
  Top Layer w10: J5.1@1600,5400 1608.64,5391.36 1608.64,5355 1695.46,5268.18 1695.46,5240.9 2051.36,4885 U1.24
NetJ7_1: J7.1 Q7.3 | length 1112.8
  Top Layer w10: J7.1 1958.98,6278.98 2673.02,6278.98 2738.69,6213.31 Q7.3
NetJ7_2: J7.2 Q3.3 | length 504.9
  Top Layer w10: J7.2 2030,6160 2209.21,6160 2272.51,6223.31 Q3.3
NetJ7_3: J7.3 Q5.3 | length 634.2
  Top Layer w10: J7.3 2138.98,6258.98 2529.75,6258.98 2570.42,6218.31 Q5.3
NetJ10_2: J10.2 R12.1 U.12 | length 2297.1
  Top Layer w10: U.12 1715,3992.28 1688.19,4019.09 1498.71,4019.09 1365.15,3885.54 1365.15,3881.4 1365.15,3878.09 cw(c1330,3850) 1353.71,3811.75 1352.93,3810.97 1350,3808.04 1350,3693.64 1375,3668.64 1375,3631.36 1350,3606.36 1350,3493.64 1375,3468.64 1375,3431.36 1350,3406.36 1350,3062.28 1254.65,2966.93 1254.65,2756.49 1329.88,2681.25 1329.88,2646.02 J10.2 1440.91,2535 R12.1
NetJ10_3: J10.3 R11.1 R19.2 | length 1537.4
  Top Layer w10: R19.2 1430,3665 1430,3114 1274.65,2958.64 1274.65,2834.92 1329.88,2779.68 1329.88,2744.45 J10.3 1389.33,2685 R11.1
NetJ10_4: J10.4 R10.1 R17.2 | length 1496.9
  Top Layer w10: R17.2 1688.03,3710.63 1665.47,3688.07 1665.47,3321.19 1294.65,2950.36 1294.65,2913.34 1329.88,2878.1 1329.88,2842.87 J10.4 1773.43,2833.43 R10.1
NetJ10_5: J10.5 R8.1 R9.1 R15.2 R27.2 | length 2746.6
  Top Layer w10: J10.5 1704.45,2931.85 1770.63,2998.03 R9.1 1770.63,3150.63 R8.1 ; R15.2@1895,3716.26 1893.03,3716.26 1785,3608.23 R8.1@1785,3166.97 ; R27.2 3068.03,2704.37 2732.4,3040 2196.99,3040 2027.47,3209.53 1829.97,3209.53 1821.18,3200.74 1821.18,3195.39 1815.32,3189.53 1807.56,3189.53 R8.1@1785,3166.97 ; R8.1 R8.1@1785,3166.97 ; R8.1 R8.1@1785,3166.97
NetJ11_1: J11.1 U1.9 | length 2204.8
  Top Layer w10: J11.1 1760,5645 1760,5581.36 2111.24,5230.12 2199.88,5230.12 U1.9
NetJ12_1: J12.1 U1.23 | length 616.5
  Top Layer w10: J12.1 1930,5270 1930,5100 2045,4985 U1.23
NetJ13_1: J13.1 U1.11 | length 2324
  Bottom Layer w10: J13.1 1355,5245 1418.64,5245 1523.76,5139.88 2153.92,5139.88 2808.81,4485 U1.11
NetJ14_1: J14.1 U1.10 | length 1970
  Top Layer w10: J14.1 2474.98,5130.02 2474.98,5055.02 U1.10
NetQ1_4: Q1.4 Q9.2 R1.2 | length 891.1
  Top Layer w10: R1.2 2881.73,1710.63 ; v1(2850,1755) 2881.73,1723.27 2881.73,1710.63 ; Q1.4 2940,1768.9 2881.73,1710.63 ; v1(2970,2190) 2970,2245.75 Q9.2
  Bottom Layer w10: v1(2850,1755) 2970,1875 v1(2970,2190)
NetQ2_3: Q2.3 Q3.1 R21.1 | length 356.9
  Top Layer w10: Q3.1 2407.6,6127.83 2446.26,6089.17 R21.1 2445,5938.74 Q2.3
NetQ4_3: Q4.3 Q5.1 R23.1 | length 355.5
  Top Layer w10: Q5.1 2642.6,6122.83 2650.63,6114.8 R23.1 2650.63,5943.03 2694.41,5899.25 Q4.3
NetQ6_3: Q6.3 Q7.1 R25.1 | length 330.5
  Top Layer w10: Q7.1 2902.6,6117.83 2915,6105.43 R25.1 Q6.3
NetQ8_1: Q8.1 R31.1 | length 178.1
  Top Layer w10: R31.1 2873.74,2608.03 2896.3,2585.47 2947.28,2585.47 3005.59,2527.17 Q8.1
NetQ8_3: Q8.3 Q9.1 R27.1 | length 506.4
  Top Layer w10: Q9.1 Q9.1@2975.16,2300.59 ; Q8.3 2980,2305.43 Q9.1@2975.16,2300.59 ; R27.1 3070,2386.1 2984.49,2300.59 Q9.1@2975.16,2300.59
NetR15_1: R15.1 R16.2 U.3 | length 567
  Top Layer w10: U.3 1715,4134.41 1777.18,4072.23 1806.44,4072.23 1895,3983.67 R15.1@1895,3795 ; R15.1@1895,3789.37 2004.37,3789.37 R16.2
NetR17_1: R17.1 R18.2 U.5 | length 768.9
  Top Layer w10: U.5 1615,4134.41 1697.18,4052.23 1798.16,4052.23 1841.81,4008.58 1841.81,3845.86 1835.95,3840 1695.86,3840 1690,3834.14 R17.1@1690,3794.37 ; R17.1 1794.37,3789.37 R18.2
NetR19_1: R19.1 R20.1 U.10 | length 335.4
  Top Layer w10: R19.1 R19.1@1476.97,3788.74 ; R20.1 1574.37,3788.74 R19.1@1476.97,3788.74 ; U.10 1608.19,3959.88 1608.19,3919.96 R19.1@1476.97,3788.74
VCC3V3: B3.15 B3.16 J2.1 J4.2@1400,5700 J11.2 J14.2 | length 3526.2
  Top Layer w10: B3.16 B3.15 1185,5024.34 1155,5054.34 1155,5455 J4.2@1400,5700
  Bottom Layer w10: J4.2@1400,5700 J11.2 J14.2 2065,5440 3238.64,5440 3410,5268.64 3446.36,5268.64 J2.1
VCC5V0: C2.2 C3.2 C4.2 J2.2 J2.4 J3.2 J4.2@3900,2080 J5.2 J6.2 J8.2 J9.2 J12.2 J13.2 L1.3 R2.2 U1.19 U.4 | length 1615
  Top Layer w10: v1(1580,4240) 1587.65,4232.35 1618.24,4232.35 1665,4185.59 U.4
  Top Layer w19.68: L1.3 5150.67,2310 C4.2 ; R2.2 5586.26,2101.97 5617.6,2133.31 5617.6,2137.75 5663.06,2183.21 5884.54,2183.21 5930,2228.67 5930,2273.22 5905.03,2298.19 5886.81,2298.19 C4.2 ; C4.2 5971.8,2310 ; 5971.8,2310 5996.8,2335 v1(6005,2335) v1(6005,2285) 5996.8,2285 5971.8,2310
VCC15V0: B1.2 C5.2 C6.2 C7.2 C8.2 J3.21 J3.22 J3.23 J11.21 J11.22 J11.23 Q1.5 Q1.6 Q3.2 Q5.2 Q7.2 R4.2 R21.2 R23.2 R25.2 | length 13081.3
  Top Layer w10: Q3.2 2482.4,6127.83 2525,6085.24 R21.2@2525,5941.97 ; Q5.2 2717.4,6122.83 2729.37,6110.87 2729.37,6058.96 ; Q7.2 2977.4,6117.83 2993.74,6101.5 2993.74,6049.59 ; J3.23 4963.15,2425 6120,2425 6819.72,1725.28 J11.21 ; C8.2 5526.65,1457.4 5538.02,1457.4 5570.63,1424.8 R4.2
  Top Layer w19.68: J3.22 4498.5,1476.5 C5.2 5005.75,1473.25 C8.2@5506.75,1473.25 ; C8.2 5515.91,1474.06 5597.05,1555.2 5597.05,1602.05 B1.2
  Top Layer w20: R21.2 2525,5941.97 2610.79,6027.76 2610.79,6160.65 2622.5,6172.36 2662.69,6172.36 2683.53,6151.53 2683.53,6104.8 2729.37,6058.96 R23.2@2729.37,5946.97 ; R23.2 R23.2@2729.37,5946.97 ; 4240,1816.85 4240,5505 3865,5880 3058.74,5880 3013.27,5925.47 3011.3,5925.47 2993.74,5943.03 R25.2 2993.74,6049.59 2945.59,6097.74 2945.59,6144.47 2922.69,6167.36 2882.5,6167.36 2870.79,6155.65 2870.79,6088.39 R23.2@2729.37,5946.97
  Top Layer w39.37: Q1.5 Q1.6 3217.76,1652.76 3381.85,1816.85 4240,1816.85 J3.23
pads on no net: "Jetson Footprint.119" "Jetson Footprint.120" "Jetson Footprint.121" "Jetson Footprint.122" B2.12 B2.13 J2.3 J2.5 J2.7 J2.11 J2.13 J2.16 J2.17 J2.18 J2.22 J2.24 J2.27 J2.28 J2.35 J2.36 J2.37 J2.38 J2.40 L1.2 L1.4 U1.1 U1.2 U1.3 U1.4 U1.7 U1.12 U1.13 U1.15 U1.16 U1.17 U1.18 U1.20 U1.21 U1.22 U1.25 U1.27 U1.28 U1.29 U1.30 U1.31 U1.33 U1.36 U1.37

## Polygon pours and split planes (outlines as drawn)
VCC5V0 on VCC5V0 Plane "VCC5V0_L02_P001" (solid, pour order 1): 1035,5225 1170,5360 3535,5360 3535,2450 6040,2450 6040,1980 5760,1980 4815,1980 1660,1980 1035,2520
GND on Ground Plane "GND_L03_P000" (solid, pour order 0): 995,6305 3535,6305 3535,2475 6790,2475 6790,1015 5650,1015 5615,1015 1535,1015 1535,1845 1015,2365

## Silkscreen, mask and mechanical layers (free items; w line width, h text height)
Top Overlay:
  text "Servo" at 1125,5175 h60 r90
  text "Ballast Pot" at 1105,4115 h30
  text "5V Headers" at 1045,3945 h39.37
  text "-" at 6525,1950.01 h60
  text "+" at 7145,1950 h60
  text "-" at 1590,1945.01 h60
  text "+" at 2180,1945 h60
  text "-" at 3845,1945.01 h60
  text "+" at 4465,1945 h60